# EAGLE board untitled (EAGLE 4.14)
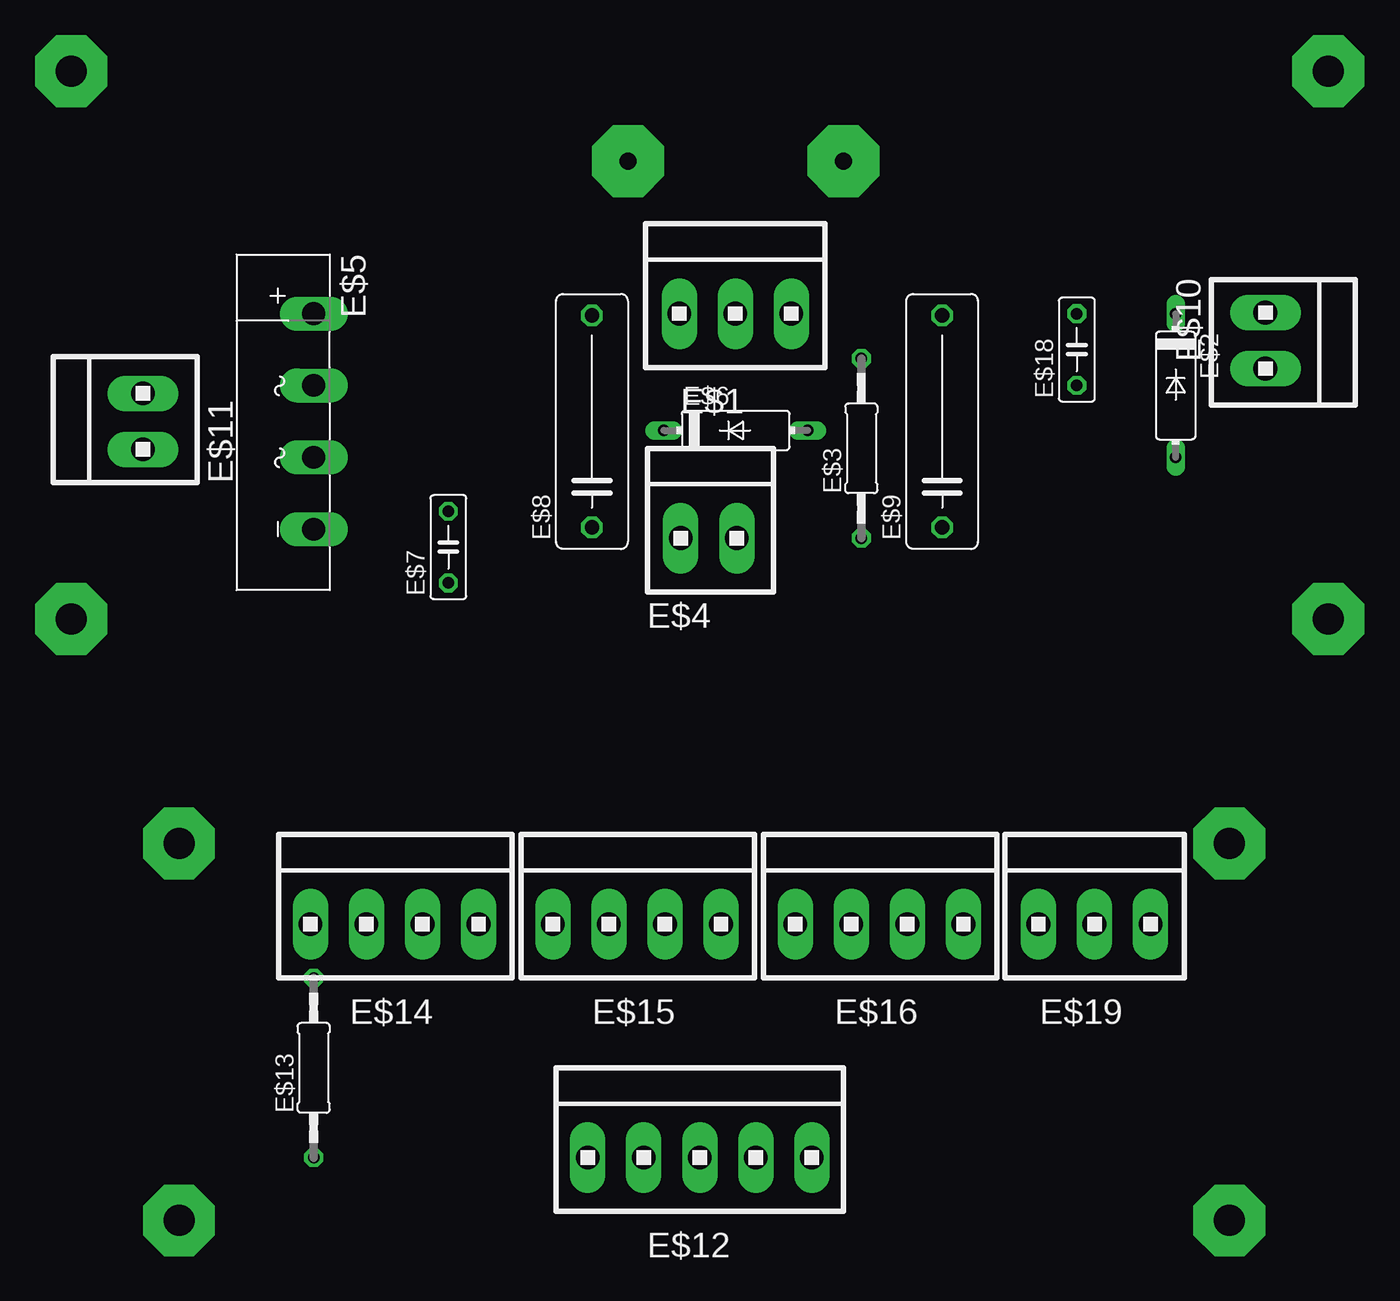
[diagram p0: board, top side]
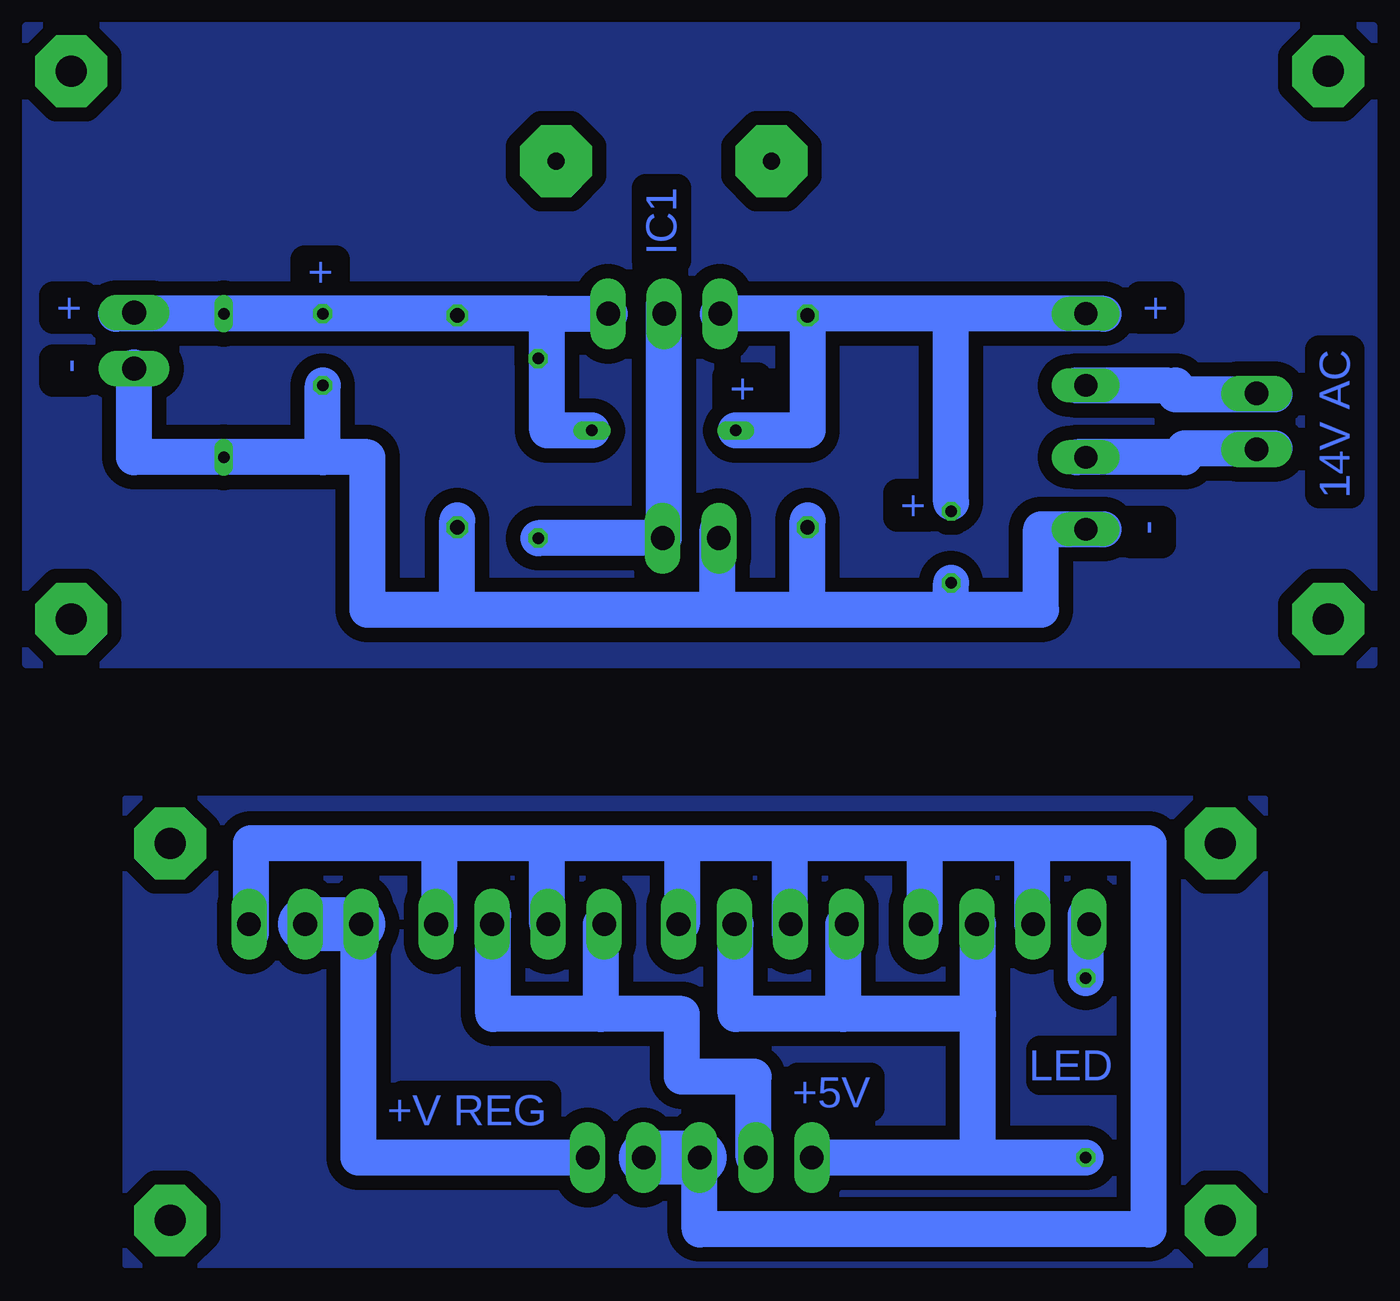
[diagram p1: board, bottom side, seen from below]

No outline drawn. Coordinates in mm, seen from the top.
Copper layers (1*16): Top 0.035mm / dielectric 1.5mm / Bottom 0.035mm
Design rules "default": minimum track width 10mil, minimum drill 24mil, track to track 8mil, track to pad 8mil, pad to pad 8mil, via to via 8mil, smd to smd 8mil, copper to edge 40mil, drill to drill 8mil, minimum pad ring 10mil, minimum via ring 8mil, stop-mask expansion 4mil, vias tented up to drill 0mil, thermal gap 10mil

## Footprints (pad centres in the part's own frame; a part is rotated, then mirrored left to right if it is on the bottom)
1X3MTA = drill 1.676 long: 1 3.937,0; 2 -0.025,0; 3 -3.988,0
C5102 = drill 0.813 long: A 5.08,0; C -5.08,0
0207/12 = drill 0.813 octagon: 1 -6.35,0; 2 6.35,0
1X2MTA = drill 1.676 long: 1 1.981,0; 2 -1.981,0
KBU = drill 1.6 long: + -7.62,2.54; - 7.62,2.54; AC1 -2.54,2.54; AC2 2.54,2.54
C050-025X075 = drill 0.813 octagon: 1 -2.54,0; 2 2.54,0
C150-054X183 = drill 1.016 octagon: 1 -7.493,0; 2 7.493,0
1X5MTA = drill 1.676 long: 1 7.925,0; 2 3.962,0; 3 0,0; 4 -3.962,0; 5 -7.925,0
1X4MTA = drill 1.676 long: 1 5.944,0; 2 1.981,0; 3 -1.981,0; 4 -5.944,0

## Placement (x,y rotation side)
E$1  [1X3MTA]  77.47,63.5 0 top
E$2  [C5102]  108.58,58.42 270 top
E$3  [0207/12]  86.36,53.98 90 top
E$4  [1X2MTA]  75.56,47.62 0 top
E$5  [KBU]  45.09,55.88 270 top
E$6  [C5102]  77.47,55.24 0 top
E$7  [C050-025X075]  57.15,46.99 90 top
E$8  [C150-054X183]  67.31,55.88 90 top
E$9  [C150-054X183]  92.08,55.88 90 top
E$10  [1X2MTA]  114.94,61.59 270 top
E$11  [1X2MTA]  35.56,55.88 90 top
E$12  [1X5MTA]  74.93,3.81 0 top
E$13  [0207/12]  47.62,10.16 90 top
E$14  [1X4MTA]  53.34,20.32 0 top
E$15  [1X4MTA]  70.48,20.32 0 top
E$16  [1X4MTA]  87.63,20.32 0 top
E$18  [C050-025X075]  101.6,60.96 90 top
E$19  [1X3MTA]  102.87,20.32 0 top

## Library data of the parts
E$1 E$4 E$10-E$12 E$14-E$16 E$19 = con-amp
E$2 E$6 = diode
E$3 E$7-E$9 E$13 E$18 = rcl
E$5 = rectifier

## Nets
S$4: E$13.2
S$6: E$3.1
S$8: E$18.1
S$13: E$12.3

## Tracks (layer width: path | path; a pad name or v marks a point on that pad's centre or on a via)
S$1
  Bottom 2.54: 57.78,42.55 50.8,42.55 50.8,48.26 46.35,48.26
S$2
  Bottom 2.54: 57.15,50.16 57.15,62.87
S$3
  Bottom 2.54: 98.42,53.34 98.42,42.55 92.08,42.55 | 92.08,42.55 92.08,48.9 | 73.66,42.55 73.66,48.26 | 73.66,42.55 92.08,42.55 | 67.31,42.55 73.66,42.55 | 67.31,42.55 67.31,48.9 | 57.15,44.45 57.15,42.55 67.31,42.55
S$4
  Bottom 2.54: E$13.2 47.62,20.95
S$5
  Bottom 2.54: 85.72,63.5 81.28,63.5 | 85.72,63.5 85.72,55.24 82.55,55.24 | 85.72,63.5 116.2,63.5
S$6
  Bottom 2.54: E$3.1 77.47,47.62 77.47,64.14
S$7
  Bottom 2.54: 47.62,3.81 66.67,3.81
S$8
  Bottom 2.54: 114.94,59.69 114.94,53.34 101.6,53.34 | 98.42,53.34 101.6,53.34 | 101.6,53.34 E$18.1
S$9
  Bottom 2.54: 72.39,55.24 67.31,55.24 67.31,63.5 | 67.31,63.5 73.66,63.5 | 46.35,63.5 67.31,63.5
S$10
  Bottom 2.54: 55.24,13.97 55.24,20.32 | 55.24,3.81 55.24,13.97 | 55.24,13.97 64.77,13.97 | 64.77,13.97 64.77,20.32 | 64.77,13.97 72.39,13.97 72.39,20.32
S$11
  Bottom 2.54: 71.12,3.81 71.12,9.53 76.2,9.53 76.2,13.97 81.92,13.97 | 81.92,13.97 81.92,20.32 | 81.92,13.97 89.53,13.97 89.53,20.95
S$12
  Bottom 2.54: 48.26,53.34 40.64,53.34 40.64,53.98 34.29,53.98
S$13
  Bottom 2.54: 51.44,20.32 51.44,26.04 52.07,26.04 | 52.07,26.04 59.05,26.04 | 59.05,26.04 68.58,26.04 | 68.58,26.04 76.2,26.04 | 76.2,26.04 106.68,26.04 106.68,19.68 | 59.05,26.04 59.05,20.32 | 68.58,26.04 68.58,19.68 | 76.2,26.04 76.2,20.32 | E$12.3 74.93,-1.27 43.18,-1.27 43.18,26.04 52.07,26.04
  Bottom 3.81: E$12.3 78.74,3.81
S$14  (via drill 2.2 pad 5.08)
  other vias: 38.1,26.04
S$15
  Bottom 2.54: 41.91,58.42 48.26,58.42
S$16
  Bottom 2.54: 41.27,58.42 41.27,57.78 34.29,57.78
S$17
  pour Bottom (isolate 1.016): 27.3,83.82 122.56,83.82 122.56,38.73 27.3,38.73
S$18  (via drill 1.2 pad 5.08)
  other vias: 69.85,74.3
S$19  (via drill 2.2 pad 5.08)
  other vias: 30.48,80.64
S$20  (via drill 1.2 pad 5.08)
  other vias: 85.09,74.3
S$21  (via drill 2.2 pad 5.08)
  other vias: 30.48,41.91
S$22  (via drill 2.2 pad 5.08)
  other vias: 119.38,41.91
S$23  (via drill 2.2 pad 5.08)
  other vias: 119.38,80.64
S$24
  pour Bottom (isolate 1.016): 34.92,29.21 34.92,-3.81 115.57,-3.81 115.57,29.21
S$25  (via drill 2.2 pad 5.08)
  other vias: 38.1,-0.64
S$26  (via drill 2.2 pad 5.08)
  other vias: 112.39,-0.64
S$27
  Bottom 2.54: 85.72,20.32 85.72,25.4
S$28
  Bottom 2.54: 93.34,20.32 93.34,25.4
S$31
  Bottom 2.54: 83.19,3.81 99.06,3.81 99.06,20.32 99.06,20.95
  Bottom 3.81: 99.06,20.32 102.87,20.32
S$32  (via drill 2.2 pad 5.08)
  other vias: 112.39,26.04

## Text on the board
Bottom: IC1 | + | + | + | 14V AC | - | + | + | - | LED | +5V | +V REG